# Altium PCB ArduinoNano.PcbDoc
Units mm, origin at the board's own origin, x right, y up, seen from the top; angles counter-clockwise.
Board outline 18.92 x 43.69 mm, 2 copper layers (Top Layer, Bottom Layer); 22 components, 43 nets, 156 pads, 45 vias.
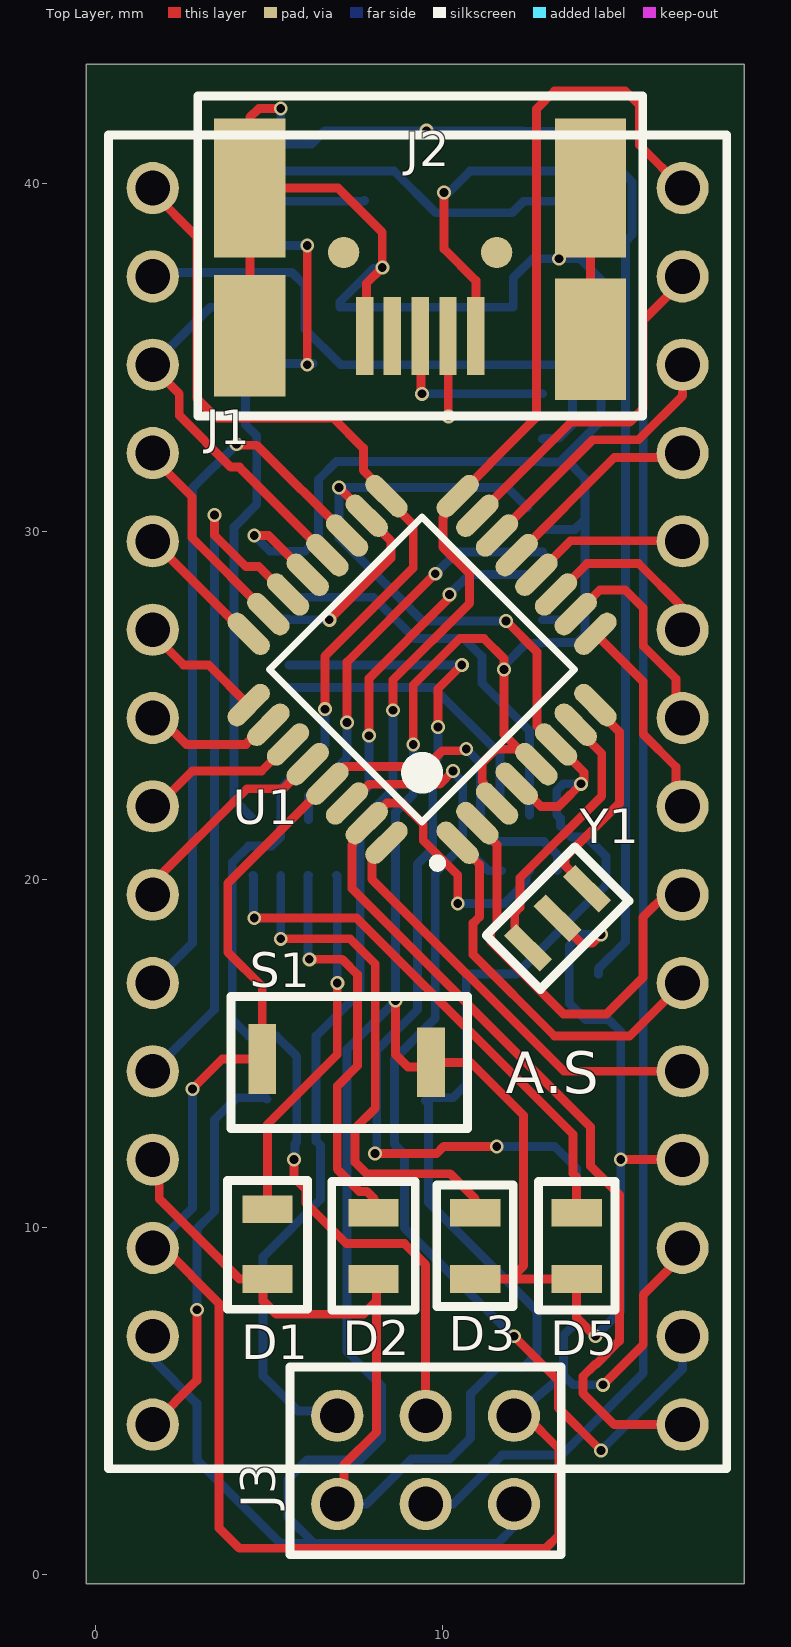
[diagram p0: Top Layer view]
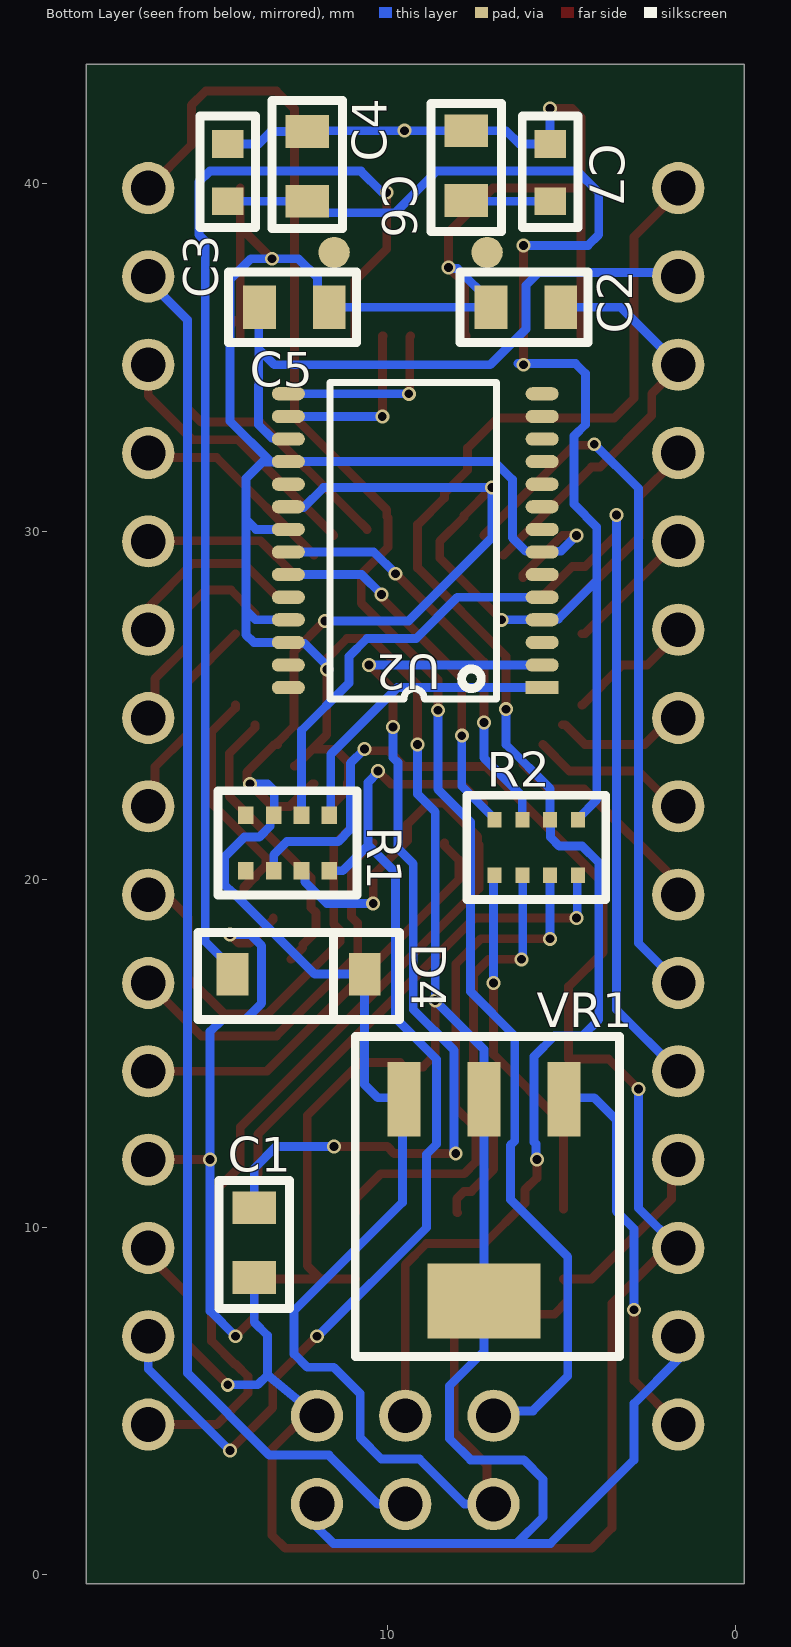
[diagram p1: Bottom Layer view, seen from below]

## Layer stack, top to bottom
Top Solder: solder mask 0.0102, Solder Resist, Dk 3.5
Top Layer: signal copper 0.0356
Dielectric 1: dielectric 0.32, FR-4, Dk 4.8
Bottom Layer: signal copper 0.0356
Bottom Solder: solder mask 0.0102, Solder Resist, Dk 3.5

## Board outline
-0.254,-0.254 18.669,-0.254 18.669,43.434 -0.254,43.434

## Design rules (kind name [scope] priority, off if disabled: settings)
Clearance [All] p1: gap=0.254 ignorepadtopadclearanceinfootprint=FALSE except(0: Arc-Hole Track-Hole SMDPad-Hole THPad-Hole Via-Hole Fill-Hole Poly-Hole Region-Hole Text-Hole)
PolygonConnect [All] p1: connectstyle=Relief reliefconductorwidth=0.254 reliefentries=4 polygonreliefangle="90 Angle" airgapwidth=0.254
RoutingVias [All] p1: holewidth=0.711 width=1.27 viastyle="Through Hole" minholewidth=0.711 minwidth=1 maxholewidth=0.711 maxwidth=1.27
SolderMaskExpansion [All] p1: expansion=0.102
Width [All] p1: maxlimit=0.254 minlimit=0.254 preferedwidth=0.254
30 further rules are at their usual default settings.

## Classes and differential pairs
component class ArduinoNano: C2 C3 C4 C5 C6 C7 D1 D2 D3 D4 D5 J2 J3 R1 R2 S1 U1 Y1

## Components (designator, comment, footprint, x,y, rotation, side; value= is the part's Value field where it differs from the comment)
C1 "0805-0.1UF" "CAP CER0805" 13.843,8.547 r90 bottom
C2 "0805-0.1UF" "CAP CER0805" 7.037,36.449 r180 bottom
C3 "0603-4.7UF" "CAP CER0603" 14.605,41.148 r270 bottom
C4 "0805-0.1UF" "CAP CER0805" 12.319,41.508 r270 bottom
C5 "0805-0.1UF" "CAP CER0805" 13.694,36.449 r180 bottom
C6 "0805-0.1UF" "CAP CER0805" 7.747,39.519 r90 bottom
C7 "0603-4.7UF" "CAP CER0603" 5.334,41.148 r270 bottom
D1 "D-RED" LEDR0805 4.953,8.509 r90 top
D2 "D-GREEN" LEDG0805 8.001,8.509 r90 top
D3 "D-YELLOR" LEDY0805 10.922,10.409 r270 top
D4 "SCHOTTKY" "Diode Schottky" 10.668,17.272 r0 bottom
D5 "D-BLUE" LEDB0805 13.843,10.409 r270 top
J1 "HEAD15" Headersx1 16.891,4.318 r0 top
J2 "USB2.0" USB-MINI_B 9.345,35.628 r180 top
J3 "ICSP" Headers2x3 9.501,4.572 r0 top
R1 "RES1K" RES1KX41206 11.684,20.244 r0 bottom
R2 "RES680" RES680x4 6.934,21.717 r180 bottom
S1 "SW" Switch 4.802,14.832 r0 top
U1 "Atmega328P" TQFP80P900X900X120-32N 9.398,26.035 r135 top
U2 "FT232RL" FT232 5.564,25.512 r0 bottom
VR1 "UA78M" UA78M 7.239,7.874 r0 bottom
Y1 "Crystal16MHz" Cristal 12.446,18.034 r45 top

## Footprints (in the part's own frame and the unit in brackets; to place one, negate y for a bottom-side part, rotate by r counter-clockwise, add the part's x,y. Pads: shape width x height; smd on the part's side, far side on the other; paste and mask are expansions set on the pad)
"CAP CER0603" [mm] "CAP CER 4.7UF 10V Y5V 0603"
  rect 0.8x0.9 smd: 1(0,0) 2(1.65,0)
  silkscreen extent -0.8,-0.8 2.4,0.8, body extent 0,-0.4 1.6,0.4, height 0.86
"CAP CER0805" [mm] "CAP CER 0.1UF 50V X7R 0805"
  rect 0.94x1.25 smd: 1(0,0) 2(2.01,0)
  silkscreen extent -0.89,-1.02 2.79,1.02, body extent 0.02,-0.65 2.02,0.65, height 1.27
Cristal [mm] "Resonadores RECOMMENDED ALT 81-CSTNE16M0V530000R"
  rect 0.5x1.45 smd: 1(0,0) 2(1.2,0) 3(2.4,0)
  silkscreen extent -0.6,-1.1 3,1.1
"Diode Schottky" [mm] "DIODE SCHOTTKY 20V 500MA SOD123"
  rect 0.91x1.22 smd: 1(0,0) 2(3.8,0)
  silkscreen extent -1,-1.2 4.8,1.3, body extent 0,-0.8 3.8,0.8, height 1.15
FT232 [mm]
  rect 0.95x0.38 smd: 1(0,0)
  oval 0.95x0.38 smd: 2(0,-0.65) 3(0,-1.3) 4(0,-1.95) 5(0,-2.6) 6(0,-3.25) 7(0,-3.9) 8(0,-4.55) 9(0,-5.2) 10(0,-5.85) 11(0,-6.5) 12(0,-7.15) 13(0,-7.8) 14(0,-8.45) 15(7.3,-8.45) 16(7.3,-7.8) 17(7.3,-7.15) 18(7.3,-6.5) 19(7.3,-5.85) 20(7.3,-5.2) 21(7.3,-4.55) 22(7.3,-3.9) 23(7.3,-3.25) 24(7.3,-2.6) 25(7.3,-1.95) 26(7.3,-1.3) 27(7.3,-0.65) 28(7.3,0)
  silkscreen extent 1.31,-8.78 6.1,0.33, body extent -0.22,-9.31 7.58,0.89, height 1.85
Headers2x3 [mm]
  round 1.5 hole 1: 1(-2.54,0) 2(0,0) 3(2.54,0) 4(-2.54,-2.54) 5(0,-2.54) 6(2.54,-2.54)
  silkscreen extent -3.9,-4 3.9,1.4, body extent -3.84,-3.8 3.78,1.2, height 8.5
Headersx1 [mm] "Headers, 36PS 1 Row"
  round 1.5 hole 1: 3V3(-15.24,33.02) 5V(-15.24,7.62) A0(-15.24,27.94) A1(-15.24,25.4) A2(-15.24,22.86) A3(-15.24,20.32) A4(-15.24,17.78) A5(-15.24,15.24) A6(-15.24,12.7) A7(-15.24,10.16) D2(0,10.16) D3(0,12.7) D4(0,15.24) D5(0,17.78) D6(0,20.32) D7(0,22.86) D8(0,25.4) D9(0,27.94) D10(0,30.48) D11(0,33.02) D12(0,35.56) D13(-15.24,35.56) GND(-15.24,2.54) GND(0,7.62) REF(-15.24,30.48) RST(-15.24,5.08) RST(0,5.08) RX0(0,2.54) TX1(0,0) VIN(-15.24,0)
  silkscreen extent -16.51,-1.27 1.27,37.08, body extent -16.51,-1.27 1.27,36.83, height 3
LEDB0805 [mm] "LED BLUE CLEAR 0805 SMD"
  rect 0.8x1.45 smd: 1(0,0) 2(1.9,0)
  silkscreen extent -0.9,-1.1 2.8,1.1, body extent 0,-0.62 2,0.63, height 1.1
LEDG0805 [mm] "LED GREEN CLEAR 0805 SMD"
  rect 0.8x1.45 smd: 1(0,0) 2(1.9,0)
  silkscreen extent -0.9,-1.2 2.8,1.2, body extent 0,-0.62 2,0.62, height 1.1
LEDR0805 [mm] "LED RED CLEAR 0805 SMD"
  rect 0.8x1.45 smd: 1(0,0) 2(2,0)
  silkscreen extent -0.88,-1.15 2.82,1.15, body extent 0,-0.62 2,0.62, height 1.1
LEDY0805 [mm] "LED YELLOW CLEAR 0805 SMD"
  rect 0.8x1.45 smd: 1(0,0) 2(1.9,0)
  silkscreen extent -0.8,-1.1 2.7,1.1, body extent 0,-0.62 2,0.63, height 1.1
RES1KX41206 [mm] "RES ARRAY 4 RES 1K OHM 1206"
  rect 0.45x0.5 smd: 1(0,0) 2(0,-1.6) 3(0.8,0) 4(0.8,-1.6) 5(1.6,0) 6(1.6,-1.6) 7(2.4,0) 8(2.4,-1.6)
  silkscreen extent -0.8,-2.3 3.2,0.7, body extent -0.4,-1.6 2.8,0, height 0.5
RES680x4 [mm] "RES ARRAY 4 RES 680 OHM 1206"
  rect 0.4x0.45 smd: 1(0,0) 2(0,-1.6) 3(0.8,0) 4(0.8,-1.6) 5(1.6,0) 6(1.6,-1.6) 7(2.4,0) 8(2.4,-1.6)
  silkscreen extent -0.8,-2.3 3.2,0.7, body extent -0.4,-1.6 2.8,0, height 0.5
Switch [mm] "688-SKRKAE"
  rect 0.8x2 smd: 1(0,0) 2(4.85,-0.1)
  silkscreen extent -0.9,-2 5.9,1.8, body extent -0.05,-1.55 4.85,1.35, height 2
TQFP80P900X900X120-32N [mm] "TQFP, 32-Leads, Body 7.00x7.00mm, Pitch 0.80mm, IPC Medium Density"
  oval 1.5x0.55 smd: 1(-4.25,2.8) 2(-4.25,2) 3(-4.25,1.2) 4(-4.25,0.4) 5(-4.25,-0.4) 6(-4.25,-1.2) 7(-4.25,-2) 8(-4.25,-2.8) 17(4.25,-2.8) 18(4.25,-2) 19(4.25,-1.2) 20(4.25,-0.4) 21(4.25,0.4) 22(4.25,1.2) 23(4.25,2) 24(4.25,2.8)
  oval 0.55x1.5 smd: 9(-2.8,-4.25) 10(-2,-4.25) 11(-1.2,-4.25) 12(-0.4,-4.25) 13(0.4,-4.25) 14(1.2,-4.25) 15(2,-4.25) 16(2.8,-4.25) 25(2.8,4.25) 26(2,4.25) 27(1.2,4.25) 28(0.4,4.25) 29(-0.4,4.25) 30(-1.2,4.25) 31(-2,4.25) 32(-2.8,4.25)
  silkscreen extent -4.37,-3.1 3.1,3.75, body extent -4.5,-4.5 4.5,4.5, height 1.1
UA78M [mm] "UA78M 500-MA, 25-V LINEAR VOLTAG"
  rect 0.95x2.15 smd: 1(-2.3,-5.8) 2(0,-5.8) 3(2.3,-5.8)
  rect 3.25x2.15 smd: 4(0,0)
  silkscreen extent -3.9,-7.6 3.7,1.6, body extent -3.25,-6.4 3.25,0.6, height 1.7
USB-MINI_B [mm] "USB - mini B USB 2.0 OTG Receptacle Connector 5 Position Surface Mount, Right Angle"
  rect 2.05x3.5 smd: 1(-4.9,0.1) 2(4.9,0)
  rect 2.05x4 smd: 3(4.9,-4.25) 4(-4.9,-4.25)
  round 0.9 all layers, no hole: 16(-2.2,-2.4) 17(2.2,-2.4)
  rect 0.5x2.25 smd: D+(0,0) D-(-0.8,0) GND(1.6,0) ID(0.8,0) VBUS(-1.6,0)
  silkscreen extent -6.4,-6.9 6.4,2.3, body extent -4.95,-8.3 4.95,0.7, height 4

## Part data
C1 C2 C4 C5 C6: library part C-CER-0.1UF
C3 C7: library part CER-4.7UF-0603
D1: library part LEDRED
D2: library part LEDGREEN
D3: library part LEDYELLOW
D4: library part D-SCHOTTKY
D5: library part LEDBLUE
J1: library part Header1x15
J3: library part Conector
S1: library part SwitchSMD
U2: library part FT232

## Via types
v1: diameter 0.4, hole 0.254, Top Layer to Bottom Layer, 45 vias

## Nets (pads, with @x,y where several pads share a name; then routed paths per layer and width w, separated by ;. In a path a pad name is that pad's centre, name@x,y a point inside that pad or via, vN(x,y) a via of type N, cw(c..) or ccw(c..) an arc to the next point about the centre after c; other vN are vias at no path point)
3V3: C5.1 J1.3V3 U2.17 | length 18.5
  Bottom Layer w0.254: J1.3V3 1.768,37.455 5.655,37.455 6.032,37.078 6.032,35.82 7.054,34.798 13.27,34.798 13.716,35.244 ; U2.17 12.888,32.686 13.331,32.686 13.72,33.075 13.72,34.198 13.716,34.203 13.716,35.244 ; C5.1 13.716,36.427 13.716,35.244
+5V: C3.2 C4.2 D1.1 D2.1 D4.1 J1.5V J3.4 R1.6 R2.7 U1.4 U1.6 U1.18 U2.4 U2.20 VR1.3 | length 111.3
  Top Layer w0.254: J1.5V 1.841,11.748 1.841,10.807 4.139,8.509 D1.1 4.826,8.382 4.826,7.874 5.207,7.493 7.711,7.493 8.092,7.874 ; v1(6.096,34.798) v1(6.096,38.227) ; v1(6.731,27.462) 8.509,29.24 8.509,29.718 7.807,30.42 U1.18 7.807,30.463 7.011,31.259 v1(7.011,31.268) ; J3.4 7.151,2.222 7.151,3.163 8.092,4.104 8.092,7.874 ; D2.1@8.326,8.509 D2.1 8.092,8.418 8.092,7.874 ; v1(11.811,27.432) 12.7,26.543 12.7,24.407 13.172,23.935 13.172,23.878 U1.6 14.056,23.074 14.056,22.828 13.326,22.098 12.817,22.098 12.168,22.747 U1.4
  Bottom Layer w0.254: 3.991,28.829 3.991,28.592 ; R2.7 4.534,21.742 3.991,22.285 3.991,28.592 ; v1(6.096,38.227) 4.248,38.227 3.937,38.538 3.937,39.751 4.553,40.367 6.571,40.367 6.574,40.37 8.592,40.37 9.792,39.17 11.991,39.17 C4.2 C3.2 ; v1@6.261,34.83 4.604,34.83 4.318,34.544 4.318,33.08 4.645,32.753 4.645,30.783 3.991,30.129 3.991,28.592 ; v1(6.731,27.462) U2.4 5.54,27.486 5.097,27.486 3.991,28.592 ; J3.4 7.795,2.032 9.089,3.326 10.184,3.326 10.795,3.937 10.795,5.207 11.557,5.969 12.319,5.969 12.7,6.35 12.7,7.588 9.581,10.707 9.581,13.556 9.501,13.636 VR1.3 9.581,13.716 10.289,13.716 10.668,14.095 D4.1 12.103,17.272 14.444,19.613 14.467,19.613 14.69,19.836 14.69,20.652 14.129,21.213 13.701,21.213 13.382,21.532 13.382,21.746 R1.6 13.27,21.858 13.27,22.554 13.462,22.746 v1(13.97,22.746) ; v1(11.811,27.432) 9.398,27.432 7.011,29.819 v1(7.011,31.268) 11.849,31.268 U2.20@12.429,30.688
A0: J1.A0 U1.23 | length 5.9
  Top Layer w0.254: J1.A0@1.651,32.131 2.782,31 2.782,29.823 U1.23
A1: J1.A1 U1.24 | length 3.8
  Top Layer w0.254: J1.A1@1.651,29.591 1.802,29.591 4.333,27.06 U1.24
A2: J1.A2 U1.25 | length 3.6
  Top Layer w0.254: J1.A2@1.651,27.051 2.54,26.162 3.261,26.162 U1.25
A3: J1.A3 U1.26 | length 3.8
  Top Layer w0.254: J1.A3@1.651,24.511 1.985,24.511 2.618,23.878 4.333,23.878 4.898,24.444 U1.26
A4: J1.A4 U1.27 | length 4.7
  Top Layer w0.254: J1.A4@1.651,21.971 2.794,23.114 4.78,23.114 U1.27
A5: J1.A5 U1.28 | length 6.3
  Top Layer w0.254: J1.A5@1.651,19.431 J1.A5 1.651,19.895 4.362,22.606 5.403,22.606 U1.28
A6: J1.A6 U1.19 | length 20.8
  Top Layer w0.254: v1(4.064,32.512) 4.092,32.484 4.646,32.484 U1.19
  Bottom Layer w0.254: J1.A6 2.794,18.161 2.794,31.242 v1(4.064,32.512)
A7: J1.A7 U1.22 | length 20.1
  Top Layer w0.254: v1(3.429,30.48) 3.429,29.894 4.327,28.996 4.699,28.996 5.503,28.192 U1.22
  Bottom Layer w0.254: J1.A7 3.429,16.256 v1(3.429,30.48)
AREF: C2.2 J1.REF U1.20 | length 12.5
  Top Layer w0.254: J1.REF@1.651,34.671 1.703,34.671 2.413,33.961 2.413,33.341 3.901,31.854 4.145,31.854 U1.20 ; J1.REF@1.778,34.798 J1.REF@2.016,34.56
  Bottom Layer w0.254: J1.REF@1.651,34.671 J1.REF@1.889,34.909 ; J1.REF 1.826,34.973 3.302,36.449 C2.2 C2.2@5.027,36.604
D0/RX: J1.RX0 R1.1 U1.30 | length 32.1
  Top Layer w0.254: U1.30 7.321,22.181 7.873,22.733 9.906,22.733 v1(10.287,23.114) ; v1(12.041,6.858) 13.312,5.586 13.312,4.804 v1(14.545,3.571)
  Bottom Layer w0.254: v1(10.287,23.114) 10.287,23.074 10.57,22.791 10.57,20.977 ; R1.1 11.303,20.244 10.57,20.977 ; v1(12.041,6.858) 12.013,6.858 8.89,9.981 8.89,12.092 8.603,12.379 8.603,14.827 9.779,16.003 9.779,20.186 10.57,20.977 ; v1(14.545,3.571) 16.891,5.917 J1.RX0
D1/TX: J1.TX1 R1.3 U1.31 | length 31.1
  Top Layer w0.254: v1(10.423,19.304) 10.423,20.122 9.431,21.114 9.431,21.591 8.831,22.191 8.382,22.191 U1.31 7.414,21.223 7.414,21.019 7.381,20.986 7.381,19.739 14.246,12.874 14.246,11.748 15.072,10.922 15.072,6.725 14.389,6.042 14.364,6.042 14.024,5.702 14.024,5.22 14.926,4.318 16.383,4.318 J1.TX1@16.51,4.445 ; J1.TX1@16.637,4.318 16.764,4.191 J1.TX1 J1.TX1@16.637,4.318
  Bottom Layer w0.254: v1(10.423,19.304) 11.758,19.304 12.386,19.932 12.386,20.146 R1.3
D2: J1.D2 U1.32 | length 12.4
  Top Layer w0.254: U1.32 8.373,20.97 7.955,20.552 7.955,20.004 13.481,14.478 J1.D2
D3: J1.D3 U1.1 | length 11.2
  Top Layer w0.254: U1.1 10.5,20.973 11.049,20.424 11.049,18.92 10.868,18.738 10.868,17.834 13.208,15.494 15.367,15.494 J1.D3
D4: J1.D4 U1.2 | length 13.1
  Top Layer w0.254: U1.2@11.069,21.616 U1.2 10.989,21.554 11.557,20.986 11.557,18.709 11.376,18.528 11.376,18.212 12.624,16.964 13.459,16.129 14.708,16.129 15.748,17.169 15.748,18.904 16.478,19.634 16.891,19.221 J1.D4
D5: J1.D5 U1.9 | length 6
  Top Layer w0.254: U1.9 15.76,25.683 15.76,24.17 16.701,23.229 16.701,22.288 J1.D5
D6: J1.D6 U1.10 | length 6.1
  Top Layer w0.254: U1.10 14.512,28.321 15.24,28.321 15.76,27.801 15.76,26.71 16.701,25.769 16.701,24.828 J1.D6
D7: J1.D7 U1.11 | length 5.3
  Top Layer w0.254: U1.11 14.143,29.083 15.621,29.083 16.891,27.813 J1.D7@16.891,27.051
D8: J1.D8 U1.12 | length 4.7
  Top Layer w0.254: U1.12 13.667,29.738 16.744,29.738 J1.D8@16.891,29.591
D9: J1.D9 U1.13 | length 5.9
  Top Layer w0.254: U1.13 14.928,32.131 J1.D9@16.891,32.131
D10: J1.D10 U1.14 | length 7.8
  Top Layer w0.254: U1.14 14.305,32.639 15.621,32.639 16.891,33.909 J1.D10@16.891,34.671
D11/MOSI: J1.D11 J3.5 U1.15 | length 50.6
  Top Layer w0.254: U1.15@10.596,30.062 U1.15 13.682,33.147 15.367,33.147 15.76,33.54 15.76,36.08 J1.D11@16.891,37.211
  Bottom Layer w0.254: J3.5 10.289,2.032 11.698,3.441 13.407,3.441 15.76,5.794 15.76,36.08 16.891,37.211 J1.D11
D12/MISO: J1.D12 J3.1 U1.16 | length 49.3
  Top Layer w0.254: v1(8.563,24.863) 8.563,25.74 10.765,27.943 10.765,28.781 9.997,29.549 9.997,30.39 10.031,30.424 10.031,30.628 12.686,33.283 12.686,42.15 13.208,42.672 15.24,42.672 15.651,42.261 15.651,41.118 J1.D12
  Bottom Layer w0.254: J3.1 6.822,4.711 5.83,4.711 4.826,5.715 4.826,9.144 6.477,10.795 6.477,12.347 6.35,12.474 6.35,15.494 7.62,16.764 7.62,21.644 8.563,22.587 v1(8.563,24.863)
D13/SCK: J1.D13 J3.2 R2.5 U1.17 | length 46.6
  Top Layer w0.254: J1.D13@1.651,39.751 2.921,38.481 2.921,33.838 3.492,33.267 6.845,33.267 7.711,32.401 7.711,31.762 8.373,31.1 U1.17 8.373,30.97 9.144,30.199 9.144,28.956 6.604,26.416 v1(6.604,24.892) ; v1(5.715,11.938) 5.715,11.411 6.059,11.067 6.059,10.687 7.221,9.525 8.89,9.525 9.501,8.914 J3.2
  Bottom Layer w0.254: v1(5.715,11.938) 5.743,11.966 5.743,12.389 5.795,12.441 5.795,14.907 5.208,15.494 4.408,15.494 3.937,15.965 3.937,20.484 4.408,20.955 5.068,20.955 5.322,21.209 5.322,21.705 R2.5 5.334,22.606 6.604,23.876 v1(6.604,24.892)
GND: C2.1 C3.1 C4.1 C5.2 C6.2 C7.1 D3.2 D5.2 J1.GND J2.1 J2.2 J2.3 J2.4 J2.GND J3.6 S1.2 U1.3 U1.5 U1.21 U2.7 U2.18 U2.21 U2.25 U2.26 VR1.2 VR1.4 Y1.2 | length 157.8
  Top Layer w0.254: J1.GND@1.651,6.731 J1.GND@1.841,6.541 ; J2.2 J2.3 ; v1(4.572,29.889) 4.979,29.889 U1.21 U1.21@6.11,28.677 ; v1(5.334,42.164) 4.699,42.164 4.445,41.91 J2.3 ; J2.GND 7.797,35.68 7.797,37.134 v1(8.255,37.592) 8.255,38.608 6.985,39.878 J2.3 ; v1(8.636,16.51) 8.636,14.959 8.99,14.605 9.525,14.605 S1.2 10.795,14.732 12.319,13.208 12.319,8.89 11.938,8.509 ; v1(9.144,23.876) 9.144,25.587 10.481,26.924 11.176,26.924 11.758,26.342 v1(11.758,26.035) 11.758,24.161 U1.5@12.18,23.739 ; D3.2 11.938,8.509 ; U1.3 11.162,22.574 11.162,22.777 11.128,22.811 11.128,23.355 11.513,23.739 U1.5@12.18,23.739 ; U1.5@12.686,23.255 12.664,23.255 U1.5@12.18,23.739 ; Y1.2 13.295,18.844 13.977,18.161 14.291,18.161 v1(14.545,18.415) ; v1(13.335,37.846) J2.4@14.245,38.756 ; J2.1 J2.4@14.245,38.756 ; J2.4 J2.4@14.245,38.756 ; v1(14.383,6.858) 13.843,7.398 D5.2 11.938,8.509 ; J2.1@14.384,36.068 14.511,35.941 J2.1@14.511,36.068 ; v1(15.113,11.938) 16.764,11.938 16.891,11.811 J1.GND@16.653,11.573
  Bottom Layer w0.254: J1.GND@1.651,6.858 1.651,6.192 2.921,4.922 2.921,3.302 5.322,0.901 6.29,0.901 ; v1(4.572,29.889) 5.025,29.436 5.54,29.436 U2.7 5.588,29.436 6.031,29.436 6.42,29.825 6.42,31.499 6.933,32.012 U2.18 12.872,32.004 13.367,32.004 ; v1(5.334,42.164) C7.1 6.223,41.148 6.604,41.529 C6.2 v1(9.525,41.529) 12.298,41.529 C4.1 13.356,41.508 13.716,41.148 C3.1 ; v1(8.255,37.592) 8.227,37.564 7.997,37.564 7.037,36.604 C2.1 C5.2 12.022,36.449 12.022,37.295 12.573,37.846 v1(13.335,37.846) 13.942,37.846 14.545,37.243 14.545,35.177 14.54,35.172 14.54,33.177 13.367,32.004 ; v1(9.144,23.876) 9.144,22.45 8.636,21.942 v1(8.636,16.51) 7.239,15.113 VR1.2 VR1.4 7.239,6.418 8.227,5.43 8.227,3.909 7.62,3.302 6.096,3.302 5.54,2.746 5.54,1.651 6.29,0.901 ; v1(11.758,26.035) 11.786,26.063 11.786,26.176 12.397,26.788 12.84,26.788 U2.26 13.858,26.812 14.084,27.038 14.084,27.738 ; J3.6 12.041,1.373 11.569,0.901 6.29,0.901 ; U2.25 13.808,27.462 14.084,27.738 ; U2.21 13.793,30.062 14.084,30.353 ; v1(14.383,6.858) 15.113,7.588 v1(15.113,11.938) 15.113,15.621 14.769,15.965 14.106,15.965 13.632,16.439 13.632,18.083 13.964,18.415 v1(14.545,18.415) ; 13.367,32.004 13.604,32.004 14.084,31.524 14.084,30.353 ; 14.084,27.738 14.084,30.353
NetC1_2: C1.2 U2.2 | length 27.5
  Top Layer w0.254: v1(8.048,12.112) 9.814,12.112 10.021,12.319 v1(11.545,12.319) ; v1(9.852,24.384) 9.852,25.473 v1(10.541,26.162)
  Bottom Layer w0.254: U2.2 v1(10.541,26.162) ; v1(8.048,12.112) 8.095,12.159 8.095,15.08 9.271,16.256 9.271,20.447 9.706,20.882 9.706,23.355 9.852,23.501 v1(9.852,24.384) ; v1(11.545,12.319) 13.208,12.319 13.843,11.684 C1.2 C1.2@13.688,10.557
NetD1_2: D1.2 R2.2 | length 10.5
  Top Layer w0.254: D1.2 4.953,12.954 6.961,14.962 v1(6.961,17.018)
  Bottom Layer w0.254: R2.2 6.961,20.09 v1(6.961,17.018)
NetD2_2: D2.2 R2.4 | length 11.7
  Top Layer w0.254: v1(6.156,17.698) 7.102,17.698 7.542,17.259 7.542,14.636 6.959,14.053 6.959,11.661 7.597,11.023 7.807,11.023 8.018,10.813 8.018,10.426 D2.2
  Bottom Layer w0.254: R2.4 6.122,20.105 6.122,17.732 v1(6.156,17.698)
NetD3_1: D3.1 R2.6 | length 15.1
  Top Layer w0.254: v1(5.334,18.288) 7.325,18.288 8.05,17.563 8.05,13.414 7.467,12.831 7.467,11.871 7.807,11.531 10.204,11.531 10.922,10.813 D3.1
  Bottom Layer w0.254: v1(5.334,18.288) R2.6
NetD5_1: D5.1 R2.8 | length 15.3
  Top Layer w0.254: v1(4.572,18.883) 7.518,18.883 13.738,12.663 13.738,11.538 13.843,11.433 D5.1 D5.1@13.817,10.435
  Bottom Layer w0.254: R2.8 4.553,20.098 4.553,18.902 v1(4.572,18.883)
NetJ2_D+: J2.D+ U2.15 | length 5.2
  Top Layer w0.254: J2.D+ 9.372,35.602 9.372,33.988 v1(9.398,33.962)
  Bottom Layer w0.254: v1(9.398,33.962) U2.15
NetJ2_D-: J2.D- U2.16 | length 5
  Top Layer w0.254: J2.D- 10.152,35.621 10.152,33.319 v1(10.16,33.312)
  Bottom Layer w0.254: v1(10.16,33.312) U2.16
NetR2_1: R2.1 U2.23 | length 10.7
  Top Layer w0.254: v1(7.874,24.13) 7.874,25.781 10.184,28.091 v1(10.184,28.194)
  Bottom Layer w0.254: R2.1 6.934,21.742 7.874,22.682 v1(7.874,24.13) ; v1(10.184,28.194) 10.752,28.762 U2.23
NetR2_3: R2.3 U2.22 | length 11.9
  Top Layer w0.254: v1(7.239,24.511) 7.239,26.246 v1(9.779,28.786)
  Bottom Layer w0.254: R2.3 6.134,22.391 7.239,23.496 v1(7.239,24.511) ; v1(9.779,28.786) 10.405,29.412 U2.22
NetU1_7: U1.7 Y1.1 | length 8.4
  Top Layer w0.254: Y1.1@12.782,17.698 Y1.1 12.446,18.121 12.065,18.502 12.065,19.04 12.215,19.19 12.215,20.043 14.564,22.392 14.564,23.617 13.817,24.364 U1.7
NetU1_8: U1.8 Y1.3 | length 7
  Top Layer w0.254: Y1.3@13.807,20.067 Y1.3 14.143,19.766 13.505,20.404 13.505,20.614 15.072,22.182 15.072,24.241 14.383,24.93 U1.8
RESET: C1.1 J1.RST J3.3 R1.5 S1.1 U1.29 | length 60.8
  Top Layer w0.254: J1.RST@1.651,9.398 1.965,9.398 3.556,7.807 3.556,1.345 4.139,0.762 12.954,0.762 13.335,1.143 13.335,3.615 12.378,4.572 J3.3 ; v1(2.794,13.97) 3.656,14.832 S1.1 4.802,16.915 3.81,17.907 3.81,19.881 U1.29 7.17,23.241 9.525,23.241 9.979,23.695 10.614,23.695 v1(10.668,23.749) ; v1(14.605,5.461) 15.76,6.616 15.76,8.053 16.891,9.184 J1.RST@16.891,9.271
  Bottom Layer w0.254: J1.RST@1.651,9.398 2.794,10.541 v1@2.794,13.843 ; v1(10.668,23.749) 10.668,23.747 11.078,23.337 11.078,21.436 11.432,21.082 12.903,21.082 13.284,20.701 R1.5 ; J3.3 13.462,5.739 ; C1.1 13.843,7.261 13.462,6.88 13.462,5.739 ; v1(14.605,5.461) 13.74,5.461 13.462,5.739
RX: R1.2 U2.1 | length 8.6
  Bottom Layer w0.254: U2.1 9.727,25.512 11.642,23.596 11.642,21.886 R1.2
TX: R1.4 U2.5 | length 11.4
  Bottom Layer w0.254: U2.5 8,28.112 9.188,26.924 10.601,26.924 11.122,26.403 11.122,25.641 12.484,24.279 R1.4
VCC: C6.1 C7.2 | length 2.4
  Bottom Layer w0.254: C7.2 7.726,39.498 C6.1
VIN: J1.VIN VR1.1 | length 11.3
  Top Layer w0.254: J1.VIN 2.921,5.588 v1(2.921,7.62)
  Bottom Layer w0.254: v1(2.921,7.62) 2.921,9.95 3.429,10.458 3.429,13.081 4.064,13.716 4.897,13.716 VR1.1
VUSB: D4.2 J2.VBUS | length 33.5
  Top Layer w0.254: v1(10.033,39.751) 10.033,38.128 10.945,37.216 J2.VBUS
  Bottom Layer w0.254: v1(10.033,39.751) 10.16,39.751 10.776,40.367 15.125,40.367 15.436,40.056 15.436,38.538 15.252,38.354 15.252,18.211 14.468,17.427 D4.2
pads on no net: J2.16 J2.17 J2.ID R1.7 R1.8 U2.3 U2.6 U2.8 U2.9 U2.10 U2.11 U2.12 U2.13 U2.14 U2.19 U2.24 U2.27 U2.28

## Silkscreen, mask and mechanical layers (free items; w line width, h text height)
Top Overlay:
  text "A.S" at 11.811,13.843 h1.2
Mechanical 1:
  lines w0.4: 0,0 14.732,0 18.519,0 18.519,43.18 0,43.18
  lines w0.508: 0,0 0,43.053